# EAGLE board richert_noiseMonitor_macrofab_12122017 (EAGLE 8.4.2)
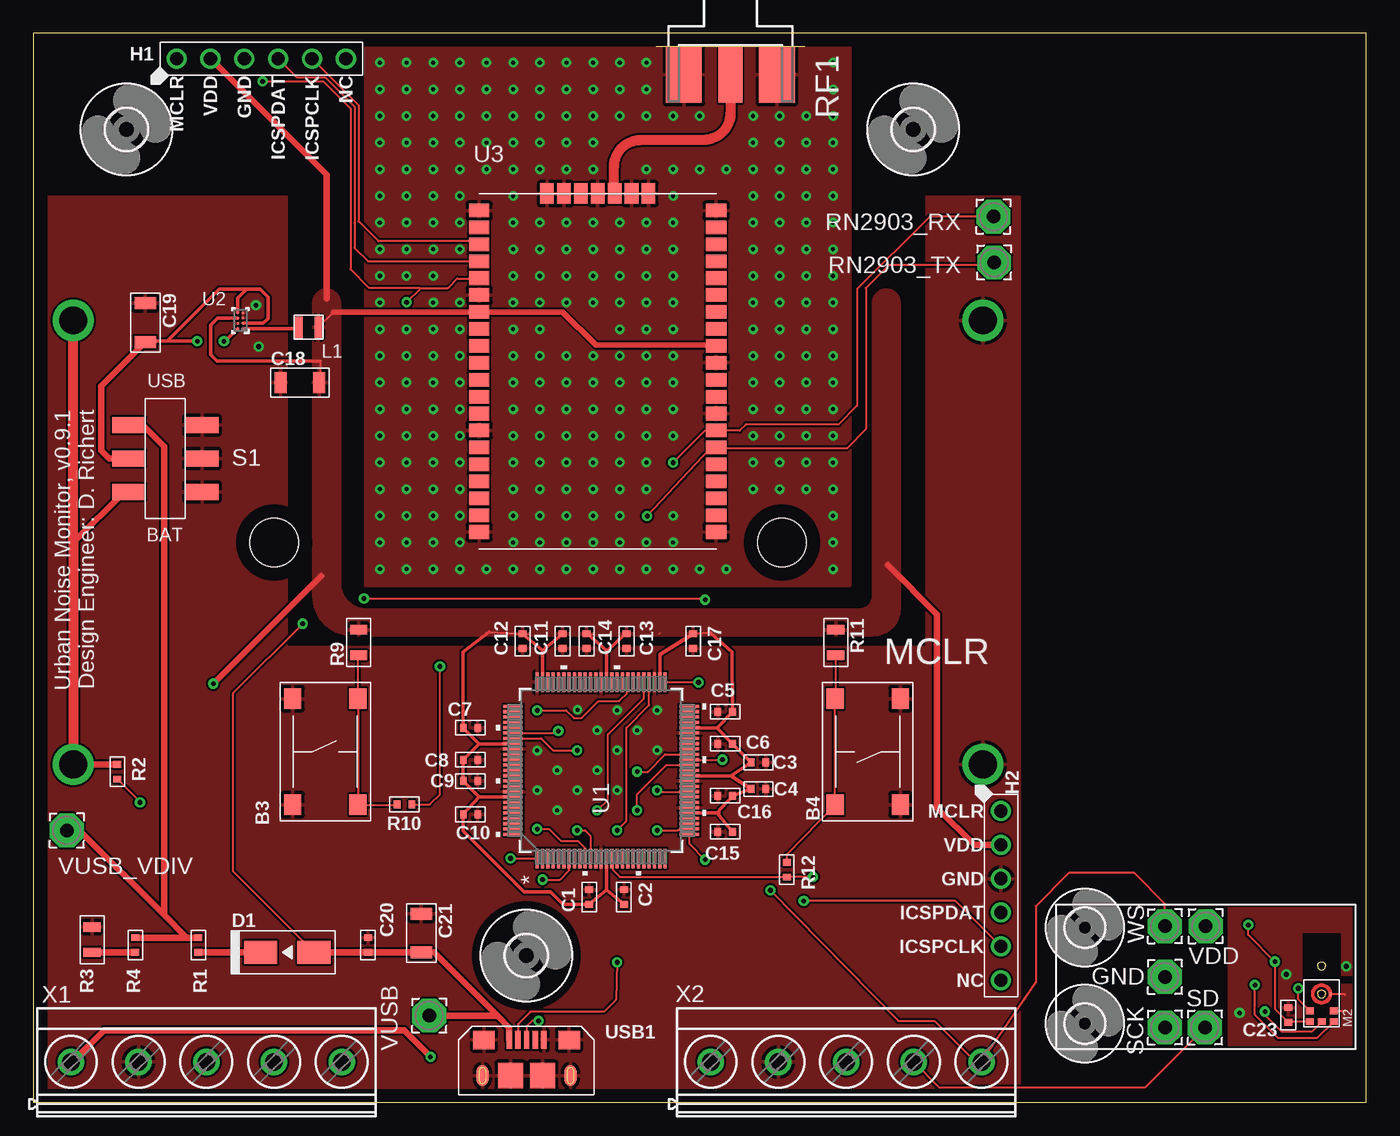
[diagram p0: board, top side]
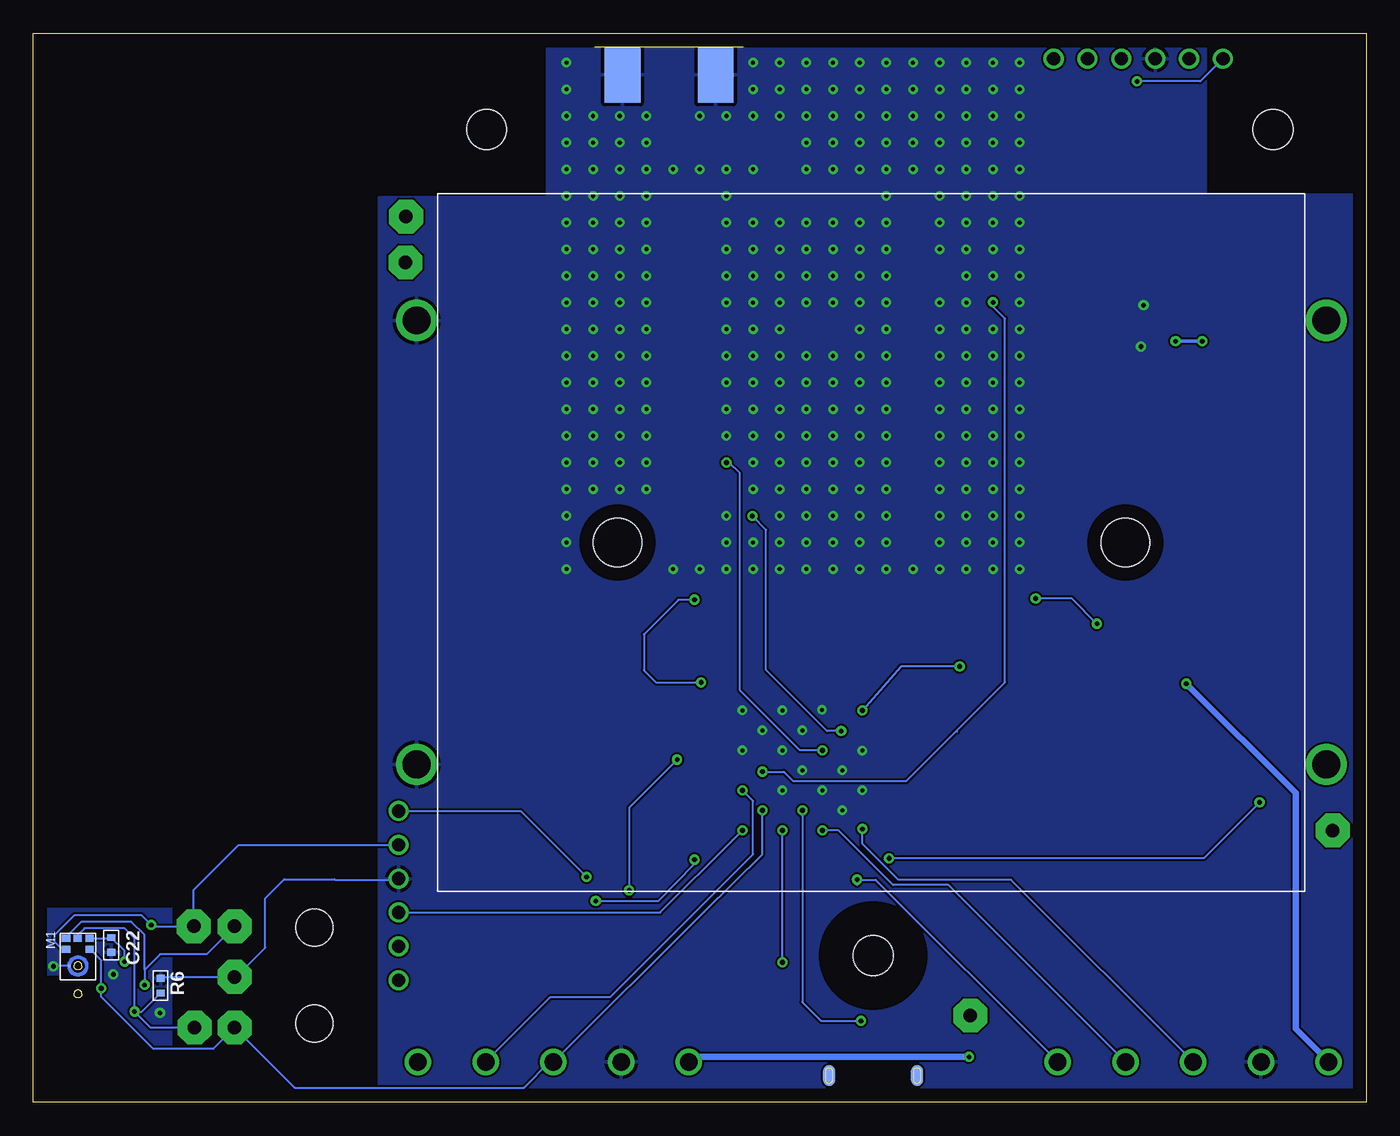
[diagram p1: board, bottom side, seen from below]

Size 100 x 80.2 mm. Coordinates in mm from the lower left corner, seen from the top.
Outline: 0,0 100,0 100,80.2 0,80.2 0,0
Copper layers (1*16): Top 0.035mm / dielectric 1.5mm / Bottom 0.035mm
Design rules "default *": minimum track width 6mil, minimum drill 0.305mm, track to track 0.15mm, track to pad 6mil, pad to pad 6mil, via to via 6mil, smd to smd 6mil, copper to edge 40mil, drill to drill 6mil, minimum pad ring 10mil, minimum via ring 8mil, stop-mask expansion 4mil, vias tented up to drill 0mil, thermal gap 10mil

## Footprints (pad centres in the part's own frame; a part is rotated, then mirrored left to right if it is on the bottom)
36-2227-ND = drill 2.08: GND1 68.25,16.66; GND2 68.25,-16.66; VBAT1 0,16.66; VBAT2 0,-16.66 | hole 3.66: 15.08,0; 53.18,0
TACT6MM = smd 1.55 x 1.3: P$1 -3.975,2.45; P$2 3.975,2.45; P$3 -3.975,-2.45; P$4 3.975,-2.45
C0402 = smd 0.5 x 0.6: P$1 -0.55,0; P$2 0.55,0
C1206 = smd 0.9 x 1.6: P$1 -1.45,0; P$2 1.45,0
SMA = smd 2.5 x 1.7: ANODE 2,0; CATHODE -2,0
2,54/1,0 = drill 1.016 pad 2.54 octagon: 1 0,0
PTH_2.54MM_01X06 = drill 1: P$1 -6.35,0; P$2 -3.81,0; P$3 -1.27,0; P$4 1.27,0; P$5 3.81,0; P$6 6.35,0
2,8 = hole 2.8: 0,0
3,0 = hole 3: 0,0
L2016 = smd 0.55 x 1.6: P$1 -0.725,0; P$2 0.725,0
ICS-43434 = smd 0.25 x 0.25: GND 2.074,-0.657 | smd 0.522 x 0.6: LR 0.822,-0.9; SCK 0.822,0.9; SD 0,0; VDD 0,0.9; WS 0,-0.9
R0402 = smd 0.5 x 0.6: P$1 -0.55,0; P$2 0.55,0
R0805 = smd 0.7 x 1.3: P$1 -0.95,0; P$2 0.95,0
J502-ND-142-0711-821/826 = smd 4.191 x 1.778: 1 2.115,0 | smd 4.191 x 2.667: G@1 2.115,3.495; G@2 2.115,-3.495 | smd 4.191 x 2.667 bottom: G@3 2.115,3.495; G@4 2.115,-3.495
DPDT = smd 1.2 x 2.5: 1 -2.5,-2.75; 2 0,-2.75; 3 2.5,-2.75; 4 -2.5,2.75; 5 0,2.75; 6 2.5,2.75
TQFP100_12X12MC = smd 1.473 x 0.229: 1 -6.617,4.8; 2 -6.617,4.4; 3 -6.617,4; 4 -6.617,3.6; 5 -6.617,3.2; 6 -6.617,2.8; 7 -6.617,2.4; 8 -6.617,2; 9 -6.617,1.6; 10 -6.617,1.2; 11 -6.617,0.8; 12 -6.617,0.4; 13 -6.617,0; 14 -6.617,-0.4; 15 -6.617,-0.8; 16 -6.617,-1.2; 17 -6.617,-1.6; 18 -6.617,-2; 19 -6.617,-2.4; 20 -6.617,-2.8; 21 -6.617,-3.2; 22 -6.617,-3.6; 23 -6.617,-4; 24 -6.617,-4.4; 25 -6.617,-4.8; 51 6.617,-4.8; 52 6.617,-4.4; 53 6.617,-4; 54 6.617,-3.6; 55 6.617,-3.2; 56 6.617,-2.8; 57 6.617,-2.4; 58 6.617,-2; 59 6.617,-1.6; 60 6.617,-1.2; 61 6.617,-0.8; 62 6.617,-0.4; 63 6.617,0; 64 6.617,0.4; 65 6.617,0.8; 66 6.617,1.2; 67 6.617,1.6; 68 6.617,2; 69 6.617,2.4; 70 6.617,2.8; 71 6.617,3.2; 72 6.617,3.6; 73 6.617,4; 74 6.617,4.4; 75 6.617,4.8 | smd 0.229 x 1.473: 26 -4.8,-6.617; 27 -4.4,-6.617; 28 -4,-6.617; 29 -3.6,-6.617; 30 -3.2,-6.617; 31 -2.8,-6.617; 32 -2.4,-6.617; 33 -2,-6.617; 34 -1.6,-6.617; 35 -1.2,-6.617; 36 -0.8,-6.617; 37 -0.4,-6.617; 38 0,-6.617; 39 0.4,-6.617; 40 0.8,-6.617; 41 1.2,-6.617; 42 1.6,-6.617; 43 2,-6.617; 44 2.4,-6.617; 45 2.8,-6.617; 46 3.2,-6.617; 47 3.6,-6.617; 48 4,-6.617; 49 4.4,-6.617; 50 4.8,-6.617; 76 4.8,6.617; 77 4.4,6.617; 78 4,6.617; 79 3.6,6.617; 80 3.2,6.617; 81 2.8,6.617; 82 2.4,6.617; 83 2,6.617; 84 1.6,6.617; 85 1.2,6.617; 86 0.8,6.617; 87 0.4,6.617; 88 0,6.617; 89 -0.4,6.617; 90 -0.8,6.617; 91 -1.2,6.617; 92 -1.6,6.617; 93 -2,6.617; 94 -2.4,6.617; 95 -2.8,6.617; 96 -3.2,6.617; 97 -3.6,6.617; 98 -4,6.617; 99 -4.4,6.617; 100 -4.8,6.617
YFP0008AGAC = smd 0.23 x 0.23: A1 -0.2,0.6; A2 0.2,0.6; B1 -0.2,0.2; B2 0.2,0.2; C1 -0.2,-0.2; C2 0.2,-0.2; D1 -0.2,-0.6; D2 0.2,-0.6
RN2903 = smd 1.524 x 1.016: GND 17.78,1.27; GND1 17.78,10.16; GND2 17.78,13.97; GND3 17.78,25.4; GND9 0,25.4; GND10 0,19.05; GND11 0,8.89; GND12 0,1.27; GPIO0 0,16.51; GPIO1 0,15.24; GPIO2 0,13.97; GPIO3 0,12.7; GPIO4 0,11.43; GPIO5 0,10.16; GPIO6 0,6.35; GPIO7 0,5.08; GPIO8 0,3.81; GPIO9 0,2.54; GPIO10 17.78,17.78; GPIO11 17.78,16.51; GPIO12 17.78,12.7; GPIO13 17.78,11.43; NC 0,24.13; P$4 17.78,24.13; P$5 17.78,22.86; P$6 17.78,21.59; P$7 17.78,20.32; P$8 17.78,19.05; P$9 17.78,6.35; P$10 17.78,5.08; P$11 0,7.62; PGC_INT 0,22.86; PGD_INT 0,21.59; RESET° 0,20.32; UART_CTS 17.78,3.81; UART_RTS 17.78,2.54; UART_RX 17.78,8.89; UART_TX 17.78,7.62; VDD 17.78,15.24; VDD2 0,17.78 | smd 1.016 x 1.524: GND4 12.7,26.67; GND5 11.43,26.67; GND6 8.89,26.67; GND7 6.35,26.67; GND8 5.08,26.67; RFH 10.16,26.67; RFL 7.62,26.67
MICROUSB-RIGHT = smd 0.4 x 1.35: 1 -1.3,1.27; 2 -0.65,1.27; 3 0,1.27; 4 0.65,1.27; 5 1.3,1.27 | smd 0.9 x 1.6: S1 -3.3,-1.4; S2 3.3,-1.4 | smd 1.6 x 1.4: S3 -3.2,1.27; S4 3.2,1.27 | smd 1.9 x 1.9: S5 -1.2,-1.405; S6 1.2,-1.405 | smd 0.9 x 1.6 bottom: S7 -3.3,-1.4; S8 3.3,-1.4
MKDSN1,5/5-5,08 = drill 1.3 pad 2: 1 -10.181,0.025; 2 -5.101,0.025; 3 -0.021,0.025; 4 5.059,0.025; 5 10.139,0.025

## Placement (x,y rotation side)
B1  BATTERY  [36-2227-ND]  3,42 0 top
B3  PUSHBUTTON  [TACT6MM]  21.9,26.3 270 top
B4  PUSHBUTTON  [TACT6MM]  62.6,26.3 90 top
C1  0.01uF  [C0402]  41.7,15.4 270 top
C2  0.1uF  [C0402]  44.3,15.4 270 top
C3  0.01uF  [C0402]  54.4,25.5 180 top
C4  0.1uF  [C0402]  54.4,23.5 180 top
C5  0.01uF  [C0402]  51.9,29.3 0 top
C6  0.1uF  [C0402]  51.9,26.9 0 top
C7  0.01uF  [C0402]  32.8,28.1 180 top
C8  0.1uF  [C0402]  32.8,25.7 180 top
C9  0.01uF  [C0402]  32.8,24.1 0 top
C10  0.1uF  [C0402]  32.8,21.6 0 top
C11  0.01uF  [C0402]  39.7,34.6 90 top
C12  0.1uF  [C0402]  36.7,34.6 90 top
C13  0.01uF  [C0402]  44.5,34.6 90 top
C14  0.1uF  [C0402]  41.5,34.6 90 top
C15  0.01uF  [C0402]  51.9,20.3 180 top
C16  0.1uF  [C0402]  51.9,23 180 top
C17  0.1uF  [C0402]  49.5,34.6 270 top
C18  10uF  [C1206]  20,54 0 top
C19  10uF  [C1206]  8.4,58.5 270 top
C20  0.1uF  [C0402]  25.1,11.8 270 top
C21  10uF  [C1206]  29.1,12.7 270 top
C22  0.1uF  [C0402]  94.15,11.8 270 bottom
C23  0.1uF  [C0402]  94.15,6.55 90 top
D1  40V 1A  [SMA]  19.06,11.25 0 top
GND  [2,54/1,0]  84.9,9.4 90 top
H1  2.54mm  [PTH_2.54MM_01X06]  17.1,78.3 0 top
H2  2.54mm  [PTH_2.54MM_01X06]  72.6,15.5 270 top
H3  MOUNT-HOLE2.8  [2,8]  78.9,13.1 0 top
H4  MOUNT-HOLE3.0  [3,0]  37,11 0 top
H5  MOUNT-HOLE3.0  [3,0]  66,73 0 top
H6  MOUNT-HOLE3.0  [3,0]  7,73 0 top
H7  MOUNT-HOLE2.8  [2,8]  78.9,5.9 0 top
L1  2.2uH  [L2016]  20.66,58.14 180 top
M1  MICROPHONE  [ICS-43434]  96.65,12.3 270 bottom
M2  MICROPHONE  [ICS-43434]  96.65,6.05 90 top
R1  15K  [R0402]  12.38,11.79 90 top
R2  1K  [R0402]  6.3,24.8 270 top
R3  20K  [R0805]  4.4,12.2 270 top
R4  10K  [R0402]  7.66,11.79 270 top
R6  100K  [R0402]  90.46,8.74 90 bottom
R9  20K  [R0805]  24.4,34.5 90 top
R10  470  [R0402]  27.84,22.34 180 top
R11  20K  [R0805]  60.2,34.5 270 top
R12  470  [R0402]  56.53,17.44 270 top
RF1  [J502-ND-142-0711-821/826]  52.3,79.2 270 top
RN2903_RX  [2,54/1,0]  72.03,66.45 0 top
RN2903_TX  [2,54/1,0]  72.08,63.01 0 top
S1  [DPDT]  9.9,48.3 90 top
SCK  [2,54/1,0]  84.9,5.6 90 top
SD  [2,54/1,0]  87.9,5.6 90 top
U1  PIC32MZ2048EFH100-I/PT  [TQFP100_12X12MC]  42.6,24.9 90 top
U2  TPS62743  [YFP0008AGAC]  15.54,58.64 180 top
U3  RN2903  [RN2903]  33.45,41.51 0 top
USB1  USB  [MICROUSB-RIGHT]  37,3.4 0 top
VDD  [2,54/1,0]  87.96,13.2 90 top
VUSB  [2,54/1,0]  29.7,6.5 0 top
VUSB_VDIV  [2,54/1,0]  2.52,20.38 0 top
WS  [2,54/1,0]  84.9,13.2 90 top
X1  MKDSN1,5/5-5,08  [MKDSN1,5/5-5,08]  13,3 0 top
X2  MKDSN1,5/5-5,08  [MKDSN1,5/5-5,08]  61,3 0 top

## Library data of the parts
B1 = myLibrary; MPN: 36-2227-ND; POPULATE: 0
B3 B4 = myLibrary; MPN: MF-SW-TACT-6MM; POPULATE: 1
C1 C3 C5 C7 C9 C11 C13 C15 = myLibrary; MPN: MF-CAP-0402-0.01uF; POPULATE: 1
C2 C4 C6 C8 C10 C12 C14 C16 C17 C20 C22 C23 = myLibrary; MPN: MF-CAP-0402-0.1uF; POPULATE: 1
C18 C19 C21 = myLibrary; MPN: MF-CAP-1206-10uF; POPULATE: 1
D1 = myLibrary; MPN: MF-DIO-SMA-B140; POPULATE: 1
GND RN2903_RX RN2903_TX SCK SD VDD VUSB VUSB_VDIV WS = wirepad
H1 H2 = myLibrary; LABEL01: MCLR; LABEL02: VDD; LABEL03: GND; LABEL04: ICSPDAT; LABEL05: ICSPCLK; LABEL06: NC; MPN: MF-CON-2.54mm-01x06; POPULATE: 0
H3-H7 = holes
L1 = myLibrary; MPN: 1285AS-H-2R2M=P2; POPULATE: 1
M1 M2 = myLibrary; MPN: ICS-43434; POPULATE: 1
R1 = myLibrary; MPN: MF-RES-0402-15K; POPULATE: 1
R2 = myLibrary; MPN: MF-RES-0402-1K; POPULATE: 1
R3 R9 R11 = myLibrary; MPN: MF-RES-0805-20K; POPULATE: 1
R4 = myLibrary; MPN: MF-RES-0402-10K; POPULATE: 1
R6 = myLibrary; MPN: MF-RES-0402-100K; POPULATE: 1
R10 R12 = myLibrary; MPN: MF-RES-0402-470; POPULATE: 1
RF1 = myLibrary; MPN: SMA-J-P-H-ST-EM1; POPULATE: 1
S1 = myLibrary; MPN: JS202011SCQN; POPULATE: 1
U1 = myLibrary; MPN: PIC32MZ2048EFH100-I/PT; POPULATE: 1
U2 = myLibrary; MPN: TPS62743YFPR; POPULATE: 1
U3 = myLibrary; MPN: RN2903A-I/RM098; POPULATE: 1
USB1 = myLibrary; MPN: MF-CON-MICROUSB-RIGHT; POPULATE: 1
X1 X2 = con-phoenix-508; MPN: 1729157; POPULATE: 0

## Nets
D+: U1.55 USB1.3
D-: U1.54 USB1.2
GND: B1.GND1 B1.GND2 B3.P$3 B3.P$4 B4.P$3 B4.P$4 C1.P$1 C2.P$1 C3.P$1 C4.P$1 C5.P$1 C6.P$1 C7.P$1 C8.P$1 C9.P$2 C10.P$2 C11.P$1 C12.P$1 C13.P$1 C14.P$1 C15.P$2 C16.P$2 C17.P$2 C18.P$1 C19.P$1 C20.P$1 C21.P$1 C22.P$2 C23.P$2 GND.1 H1.P$3 H2.P$3 M1.GND M2.GND M2.LR R3.P$1 R6.P$2 RF1.G@1 RF1.G@2 RF1.G@3 RF1.G@4 S1.1 S1.2 S1.3 U1.13 U1.31 U1.36 U1.45 U1.53 U1.63 U1.75 U1.84 U1.92 U2.B2 U2.C1 U2.D1 U3.GND U3.GND1 U3.GND2 U3.GND3 U3.GND4 U3.GND5 U3.GND6 U3.GND7 U3.GND8 U3.GND9 U3.GND10 U3.GND11 U3.GND12 USB1.5 USB1.S1 USB1.S2 USB1.S3 USB1.S4 USB1.S5 USB1.S6 X1.2 X2.2
N$1: L1.P$2 U2.A1
N$2: C19.P$2 S1.5 U2.A2 U2.B1 U2.D2
N$3: B1.VBAT1 B1.VBAT2 R2.P$1 S1.4
N$4: D1.CATHODE R1.P$1
N$6: R3.P$2 R4.P$2
N$7: H1.P$4 U3.PGD_INT
N$8: U1.100
N$9: H1.P$5 U3.PGC_INT
N$10: RF1.1 U3.RFH
N$11: U1.99
N$14: B3.P$1 B3.P$2 R9.P$1 R10.P$2
N$15: R10.P$1 U1.58
N$17: H2.P$4 U1.27
N$18: H2.P$5 U1.26
N$19: B4.P$1 B4.P$2 R11.P$2 R12.P$1
PIC32_MCLR: H2.P$1 R12.P$2 U1.15
RN2903_MCLR: H1.P$1 U1.41 U3.RESET°
RN2903_RX: RN2903_RX.1 U1.82 U3.UART_RX
RN2903_TX: RN2903_TX.1 U1.81 U3.UART_TX
SCK2: U1.10 X1.3
SCK5: M1.SCK M2.SCK SCK.1 U1.39 X2.3
SDI2: U1.11 X1.4
SDI5: M1.SD M2.SD R6.P$1 SD.1 U1.34 X2.4
SS2: U1.7 X1.5
SS5: M1.WS M2.WS U1.40 WS.1 X2.5
VBAT: R2.P$2 U1.1
VDD: C1.P$2 C2.P$2 C3.P$2 C4.P$2 C5.P$2 C6.P$2 C7.P$2 C8.P$2 C9.P$1 C10.P$1 C11.P$2 C12.P$2 C13.P$2 C14.P$2 C15.P$1 C16.P$1 C17.P$1 C18.P$2 C22.P$1 C23.P$1 H1.P$2 H2.P$2 L1.P$1 M1.LR M1.VDD M2.VDD R9.P$2 R11.P$1 U1.14 U1.30 U1.37 U1.46 U1.52 U1.62 U1.74 U1.83 U1.93 U2.C2 U3.VDD U3.VDD2 VDD.1 X1.1 X2.1
VUSB: C20.P$2 C21.P$2 D1.ANODE U1.51 USB1.1 VUSB.1
VUSB_VDIV: R1.P$2 R4.P$1 S1.6 VUSB_VDIV.1

## Tracks (layer width: path | path; a pad name or v marks a point on that pad's centre or on a via)
D+  (via drill 0.35)
  Top 0.152: v42.3,21.9 43.1,22.7 43.1,27.6 45.8,30.3 U1.55 | v37.9,6.1 37.4,6.1 37,5.7 USB1.3
  Bottom 0.152: v42.3,21.9 42.3,7.5 40.9,6.1 v37.9,6.1
D-  (via drill 0.35)
  Top 0.152: v43.8,10.5 43.7,7.7 42.8,6.8 37.3,6.8 36.35,5.85 USB1.2 | v43.8,20.4 44.5,21.1 44.5,28.1 46.2,29.8 U1.54
  Bottom 0.152: v43.8,10.5 v43.8,20.4
GND  (via drill 0.3, 0.35)
  Top 0.152: 71.29,25.3 B1.GND2 | M2.GND 98.4,8.12 98.4,8.05 | M2.LR 98.4,6.87 98.4,6.8
  Bottom 0.152: M1.GND 98.5,10.23 v98.5,10.2 | R6.P$2 90.35,9.4 GND.1 84.8,9.4 82.6,11.6 82.6,15.3 81.17,16.73 77.39,16.73 77.36,16.7 72.67,16.7 H2.P$3
  other vias: 26,78 16.7,59.8 16.9,56.7 28,78 30,78 32,78 34,78 36,78 38,78 40,78 42,78 44,78 46,78 60,78 26,76 28,76 30,76 32,76 34,76 36,76 38,76 40,76 42,76 44,76 46,76 26,74 28,74 30,74 32,74 34,74 36,74 38,74 40,74 42,74 44,74 46,74 26,72 28,72 30,72 32,72 34,72 36,72 38,72 40,72 42,72 26,70 28,70 30,70 32,70 34,70 36,70 38,70 40,70 42,70 26,68 28,68 30,68 32,68 36,68 46,70 48,70 50,70 52,70 54,70 56,70 58,70 60,70 54,72 56,72 58,72 60,72 54,74 56,74 58,74 60,74 60,76 48,68 54,68 56,68 58,68 60,68 36,66 38,66 40,66 42,66 44,66 46,66 48,66 36,64 38,64 40,64 42,64 44,64 46,64 48,64 36,62 38,62 40,62 42,62 44,62 46,62 48,62 42,60 44,60 46,60 48,60 26,66 28,66 30,66 32,66 54,66 56,66 58,66 60,66 54,64 56,64 58,64 60,64 54,62 56,62 58,62 60,62 54,60 56,60 58,60 60,60 54,50 56,50 58,50 60,50 54,48 56,48 58,48 60,48 54,46 56,46 58,46 60,46 54,58 56,58 58,58 60,58 54,56 56,56 58,56 60,56 54,54 56,54 58,54 60,54 54,52 56,52 58,52 60,52 60,44 60,42 60,40 36,56 38,56 40,56 42,56 44,56 46,56 48,56 36,54 38,54 40,54 42,54 44,54 46,54 48,54 36,52 38,52 40,52 42,52 44,52 46,52 48,52 36,50 38,50 40,50 42,50 44,50 46,50 36,48 38,48 40,48 42,48 44,48 46,48 36,46 38,46 40,46 42,46 44,46 46,46 36,44 38,44 40,44 42,44 44,44 36,42 38,42 40,42 42,42 44,42 26,40 28,40 30,40 32,40 34,40 36,40 38,40 40,40 42,40 44,40 46,40 48,40 50,40 52,40 48,50 48,44 48,42 46,42 26,58 26,56 26,54 26,52 26,50 26,48 26,46 26,44 26,42 28,58 28,56 28,54 28,52 28,50 28,48 28,46 28,44 28,42 30,58 30,56 30,54 30,52 30,50 30,48 30,46 30,44 30,42 36,58 38,58 44,58 46,58 48,58 48,74 50,74 26,64 28,64 30,64 32,64 26,62 28,62 30,62 26,60 36,60 38,60 40,60 30,60 32,60 32,58 32,56 32,54 32,52 32,50 32,48 32,46 32,44 32,42 37.8,26.39 37.8,23.4 39.3,24.9 39.3,21.9 40.8,23.4 42.3,24.9 42.3,27.9 43.8,29.4 40.83,29.43 43.8,26.4 43.8,23.4 46.8,26.4 45.3,27.9 46.8,29.4 94,9.6 90.5,6.7
  pour Top: 61.3,80.1 61.3,38.7 24.9,38.7 24.9,80.1
  pour Top: 1,68 19,68 19,34.2 67,34.2 67,68 74,68 74,1 1,1
  pour Bottom: 1,68.1 12,68.1 12,79.6 61.5,79.6 61.5,67.9 74.1,67.9 74.1,0.7 0.7,0.7
  pour Top: 98.15,9.55 99.1,9.55 99.1,14.55 89.65,14.55 89.65,4.3 98.9,4.3 98.9,8.8 98.15,8.8 98.15,5.55 95.15,5.55 95.15,12.8 98.15,12.8
  pour Bottom: 98.15,9.55 99.1,9.55 99.1,14.55 89.65,14.55 89.65,4.3 98.9,4.3 98.9,8.8 98.15,8.8 98.15,5.55 95.15,5.55 95.15,12.8 98.15,12.8
N$1
  Top 0.152: L1.P$2 19.84,58.04 L1.P$2
  Top 0.25: U2.A1 19.84,58.04
N$2  (via drill 0.35)
  Top 0.152: 14.4,57.1 v14.3,57.1 | 8.45,57.1 C19.P$2 | 9.9,57.1 10.05,57.1
  Top 0.25: U2.D2 15.34,60.34 16,61 | 16,61 17,61 17.6,60.4 17.6,58.8 17.24,58.44 U2.B1 | 16,61 13.95,61 10.05,57.1 | U2.A2 14.4,57.1 | v12.3,57.1 9.9,57.1 8.45,57.1
  Top 0.5: S1.5 5.7,48.3 5.1,48.9 5.1,53.75 C19.P$2
  Bottom 0.25: v14.3,57.1 v12.3,57.1
N$3
  Top 0.152: 6.8,45.8 S1.4 | R2.P$1
  Top 0.5: 3,42 6.8,45.8 | B1.VBAT2 R2.P$1
  Top 0.75: B1.VBAT2 3,42 B1.VBAT1
N$4
  Top 0.152: R1.P$1
  Top 0.5: D1.CATHODE R1.P$1
N$6
  Top 0.152: R3.P$2
  Top 0.5: R4.P$2 R3.P$2
N$7
  Top 0.152: U3.PGD_INT 25.1,63.1 24.1,64.1 24.1,65.97 24.1,74.69 21.88,76.9 19.77,76.9 H1.P$4
N$9
  Top 0.152: H1.P$5 24.4,74.81 24.4,66.1 25.9,64.6 33.22,64.6 U3.PGC_INT
N$10
  Top 0.152: U3.RFH 43.57,68.29
  Top 0.75: RF1.1 52.3,74.2 arc-90 50.3,72.2 45.57,72.2 arc90 43.57,70.2 43.57,68.29
N$14
  Top 0.152: R9.P$1 24.35,33.5 B3.P$1 B3.P$2 27.27,22.32 R10.P$2
N$15  (via drill 0.35)
  Top 0.152: R10.P$1 29.74,22.34 30.5,23.1 v30.5,32.7 | U1.58 44.54,31.46 44.54,30.68 43.96,30.1 42.4,30.1 41.12,28.82 40.56,28.82 39.98,29.4 v37.8,29.4
  Bottom 0.152: v30.5,32.7 34.9,32.7 v37.8,29.4
N$17  (via drill 0.35)
  Top 0.152: v46.8,20.4 48.34,20.4 48.38,20.44 49.16,20.44 U1.27
  Bottom 0.152: H2.P$4 52.97,14.23 47.55,19.65 | 47.55,19.65 47.5,19.7 | 47.55,19.65 v46.8,20.4
N$18  (via drill 0.35)
  Top 0.152: H2.P$5 69.19,15.1 v57.8,15.1 | v50.4,18.2 49.22,19.38 U1.26
  Bottom 0.152: v57.8,15.1 53.1,15.1 50.4,17.9 v50.4,18.2
N$19
  Top 0.152: R12.P$1 56.53,18.61 B4.P$1 B4.P$2 60.2,30.32 R11.P$2
PIC32_MCLR  (via drill 0.35)
  Top 0.152: U1.15 43.46,18.23 43.46,17.45 44.01,16.9 R12.P$2 v58.5,16.9
  Bottom 0.152: H2.P$1 63.45,21.85 v58.5,16.9
RN2903_MCLR  (via drill 0.35)
  Top 0.152: v17.2,76.6 19.64,76.6 21.76,76.6 23.8,74.56 23.8,62.51 25.2,61.1 29,61.1 | 29,61.1 31.1,61.1 31.8,61.8 33.42,61.8 U3.RESET° | 49.16,26.04 U1.41 47.4,26.1 46.1,24.8 v45.3,24.8 | v28,60.02 29,61.02 29,61.1
  Bottom 0.152: H1.P$1 12.45,76.6 v17.2,76.6 | v45.3,24.8 43.7,24.8 43,24.1 34.5,24.1 30.75,27.85 | 30.75,27.85 27.1,31.5 27.1,58.8 28,59.7 v28,60.02 | 30.7,27.8 30.75,27.85
RN2903_RX  (via drill 0.35)
  Top 0.152: U1.82 38.1,27.3 39,26.4 v40.8,26.4 | v48,48 50.4,50.4 U3.UART_RX 51.24,50.38 52.99,50.38 53.47,50.86 60.41,50.86 61.81,52.26 61.81,61.01 67.25,66.45 RN2903_RX.1
  Bottom 0.152: v40.8,26.4 42.5,26.4 47,30.9 47,47.2 47.8,48 v48,48
RN2903_TX  (via drill 0.35)
  Top 0.152: RN2903_TX.1 71.89,62.82 64.19,62.82 62.47,61.09 62.47,50.49 61.07,49.09 51.33,49.09 51.27,49.09 | U3.UART_TX 51.27,49.09 | U1.81 39.24,27.7 v39.39,27.85 | v46.05,43.99 50.2,48.43 50.24,48.46 50.87,49.09 51.27,49.09
  Bottom 0.152: v39.39,27.85 40.44,27.85 45.01,32.42 45.01,42.95 v46.05,43.99
SCK2  (via drill 0.35)
  Top 0.152: v37.8,20.5 38.7,20.5 39.6,19.6 40.86,19.6 41.34,19.11 41.34,18.34 U1.10
  Bottom 0.152: X1.3 26.65,16.7 35.1,16.7 37.8,19.4 v37.8,20.5
SCK5  (via drill 0.35)
  Top 0.152: v45.3,21.9 45.3,23.1 47.5,25.3 U1.39 | M2.SCK 94.9,7.72 v94.9,8.55
  Bottom 0.152: v45.3,21.9 45.3,18.6 49.67,14.27 X2.3 61.27,3.02 63.2,1.09 80.39,1.09 SCK.1 86.5,4 91,4 94.9,7.9 v94.9,8.55 94.9,10.63 M1.SCK
SDI2  (via drill 0.35)
  Top 0.152: v40.8,20.4 41.4,20.4 41.8,20 U1.11
  Bottom 0.152: X1.4 31.33,16.3 35.5,16.3 39.6,20.4 v40.8,20.4
SDI5  (via drill 0.35)
  Top 0.152: v46.8,23.4 46.9,23.3 U1.34 | M2.SD 95.9,5.3 93.65,5.3 92.4,6.55 v92.4,6.8 | SD.1 83.39,1.09 67.99,1.09 X2.4
  Bottom 0.152: X2.4 61.18,7.9 56.7,7.9 46,18.6 46,22.6 v46.8,23.4 | v92.4,6.8 92.4,12.3 93.15,13.05 96.15,13.05 96.65,12.55 M1.SD | v92.4,6.8 91.85,6.8 R6.P$1 90.46,8.16 | SD.1 91.2,5.6 v92.4,6.8
SS2  (via drill 0.35)
  Top 0.152: v38.2,16.7 39.5,16.7 40.2,17.4 U1.7
  Bottom 0.152: X1.5 36.81,16.7 v38.2,16.7 38.2,16.3
SS5  (via drill 0.35)
  Top 0.152: U1.40 v51.7,25.7 | v55.3,15.9 64.9,6.1 67.6,6.1 70.67,3.02 71.1,3.02 | 71.1,3.02 X2.5 | M2.WS 96.3,4.8 93.4,4.8 91.65,6.55 v91.65,8.8 | WS.1 84.9,14.9 82.6,17.2 77.7,17.2 75.2,14.7 75.2,9.03 71.1,3.02
  Bottom 0.152: v51.7,25.7 55.3,22.1 v55.3,15.9 | 71.22,3.02 X2.5 | 91.65,9.95 v91.65,8.8 | 91.65,9.95 91.65,12.55 92.65,13.55 96.4,13.55 97.55,12.4 M1.WS | WS.1 87,11.1 90.5,11.1 91.65,9.95
VBAT  (via drill 0.35)
  Top 0.152: R2.P$2 8,22.55 v8,22.5 | v35.8,18.3 35.82,18.28 U1.1
  Bottom 0.152: v8,22.5 12.2,18.3 v35.8,18.3
VDD  (via drill 0.35)
  Top 0.152: 49.27,24.55 U1.37 | 21.5,55.6 21.5,54.05 C18.P$2 | 37.15,35.1 C12.P$2 34.2,35.3 | 41.95,35.1 41.59,35.14 C14.P$2 | 44.25,35.1 44.39,35.13 C13.P$2 | 47,35.2 46.95,35.15 | 43,33.8 43.05,33.85 | 50.8,35.2 C17.P$1 | C1.P$2 arc-90 41.65,14.8 | 22.54,59.29 L1.P$1 | 51.18,56.8 U3.VDD | 21.6,39.5 21.7,39.5 | 2.92,3.02 X1.1 | H2.P$2 | M2.VDD 94.2,6.05 C23.P$1 93.15,7 v93.15,10.55 91.15,12.55 v91.15,13.3 | 87.96,13.3 VDD.1
  Top 0.25: U2.C2 13.84,58.84 13.3,58.3 13.3,56.1 13.8,55.6 21.5,55.6 | U1.83 33.45,26.9 | 33.45,26.9 C8.P$2 C9.P$1 33.45,22.9 | 33.45,26.9 C7.P$2 32.25,33.8 34.2,35.3 | 33.45,22.9 U1.93 | 33.45,22.9 C10.P$1 32.25,20.35 36.8,15.8 38.8,15.8 39.75,14.85 C1.P$2 43,15.95 | 43,15.95 U1.14 | 51.3,21.7 U1.30 | 51.3,21.7 51.45,21.7 | 52.35,24.5 U1.37 | 51.3,28.1 U1.46 | 51.3,21.7 C16.P$1 C4.P$2 52.35,24.5 | C15.P$1 51.3,21.7 | 52.35,24.5 C3.P$2 C6.P$2 51.3,28.1 | 51.3,28.1 C5.P$2 52.4,33.8 50.8,35.2 | U1.52 47,33.6 C17.P$1 | U1.62 43,33.8 | 44.39,35.13 43.05,33.85 41.59,35.14 | U1.74 38.2,33.9 | 38.2,33.9 C11.P$2 | 38.2,33.9 C12.P$2 | C2.P$2 43,15.95
  Top 0.4: 22.54,59.29 U3.VDD2 39.71,59.29 42.2,56.8 51.18,56.8
  Top 0.5: H1.P$2 22,69.59 22,60.3 | H2.P$2 70.59,19.31 67.8,22.1 67.8,36.6 64.1,40.3 | v13.5,31.4 21.6,39.5 | v29.8,3.4 27.8,5.4 5.3,5.4 2.92,3.02
  Bottom 0.152: X2.1 50.44,3.4 | v93.15,10.55 93.15,11.35 C22.P$1 94.2,12.3 M1.VDD | M1.LR 97.83,11.48 98.4,12.05 98.4,12.55 96.9,14.05 91.9,14.05 v91.15,13.3 91.15,13.2 VDD.1 87.96,15.94 84.6,19.3 H2.P$2
  Bottom 0.5: v13.5,31.4 5.3,23.2 5.3,5.51 X1.1 | 50.44,3.4 v29.8,3.4
  pour Top: 22,61 arc-90 23,60 23,39 arc90 25,37 62,37 arc90 63,38 63,60 arc-90 64,61 arc-90 65,60 65,37 arc-90 63,35 24,35 arc-90 21,38 21,60 arc-90
VUSB  (via drill 0.35)
  Top 0.152: 30.05,11.25 C21.P$2 | 34.8,6.5 34.9,6.4 | D1.ANODE 15,17.31 15,30.7 v20.2,35.9 | v24.8,37.8 50.3,37.8 v50.4,37.7 | v49.9,31.5 47.42,31.5 U1.51
  Top 0.5: 30.05,11.25 34.9,6.4 35.7,5.6 USB1.1 | C21.P$2 C20.P$2 D1.ANODE | VUSB.1 34.8,6.5
  Bottom 0.152: v20.2,35.9 22.1,37.8 v24.8,37.8 | v50.4,37.7 51.6,37.7 54.2,35.1 54.2,32.4 53.3,31.5 v49.9,31.5
VUSB_VDIV
  Top 0.152: 8.2,50.8 S1.6 | 3.46,20.38 VUSB_VDIV.1
  Top 0.5: R4.P$1 11.5,12.34 | 11.5,12.34 R1.P$2 | 11.5,12.34 9.8,14.04 | 9.8,14.04 9.8,49.2 8.2,50.8 | 9.8,14.04 3.46,20.38

## Text on the board
tNames: USB | Urban Noise Monitor, v0.9.1 / Design Engineer: D. Richert | BAT | MCLR